# Altium PCB PCB1.PcbDoc (part 1 of 2)
Units mil, origin at the board's own origin, x right, y up, seen from the top; angles counter-clockwise.
Board outline 2180.03 x 4000.03 mil, 4 copper layers (Top Layer, GROUND, PWR, Bottom Layer), stack 23.756 mil thick; 106 components, 124 nets, 404 pads, 178 vias.
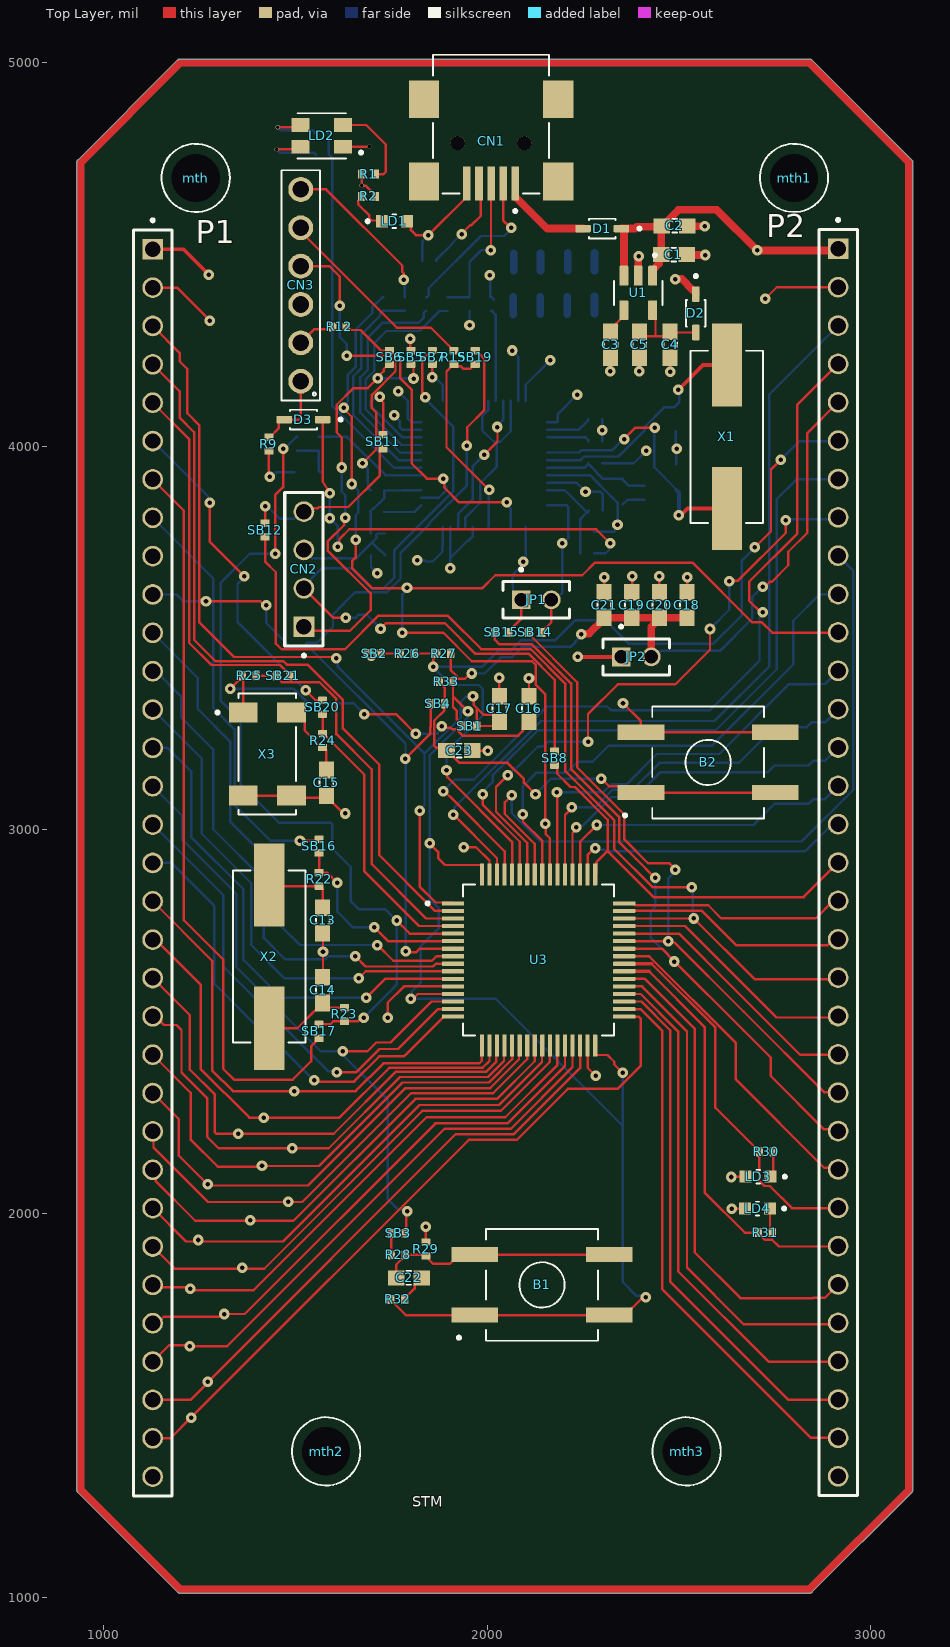
[diagram p0: Top Layer view]
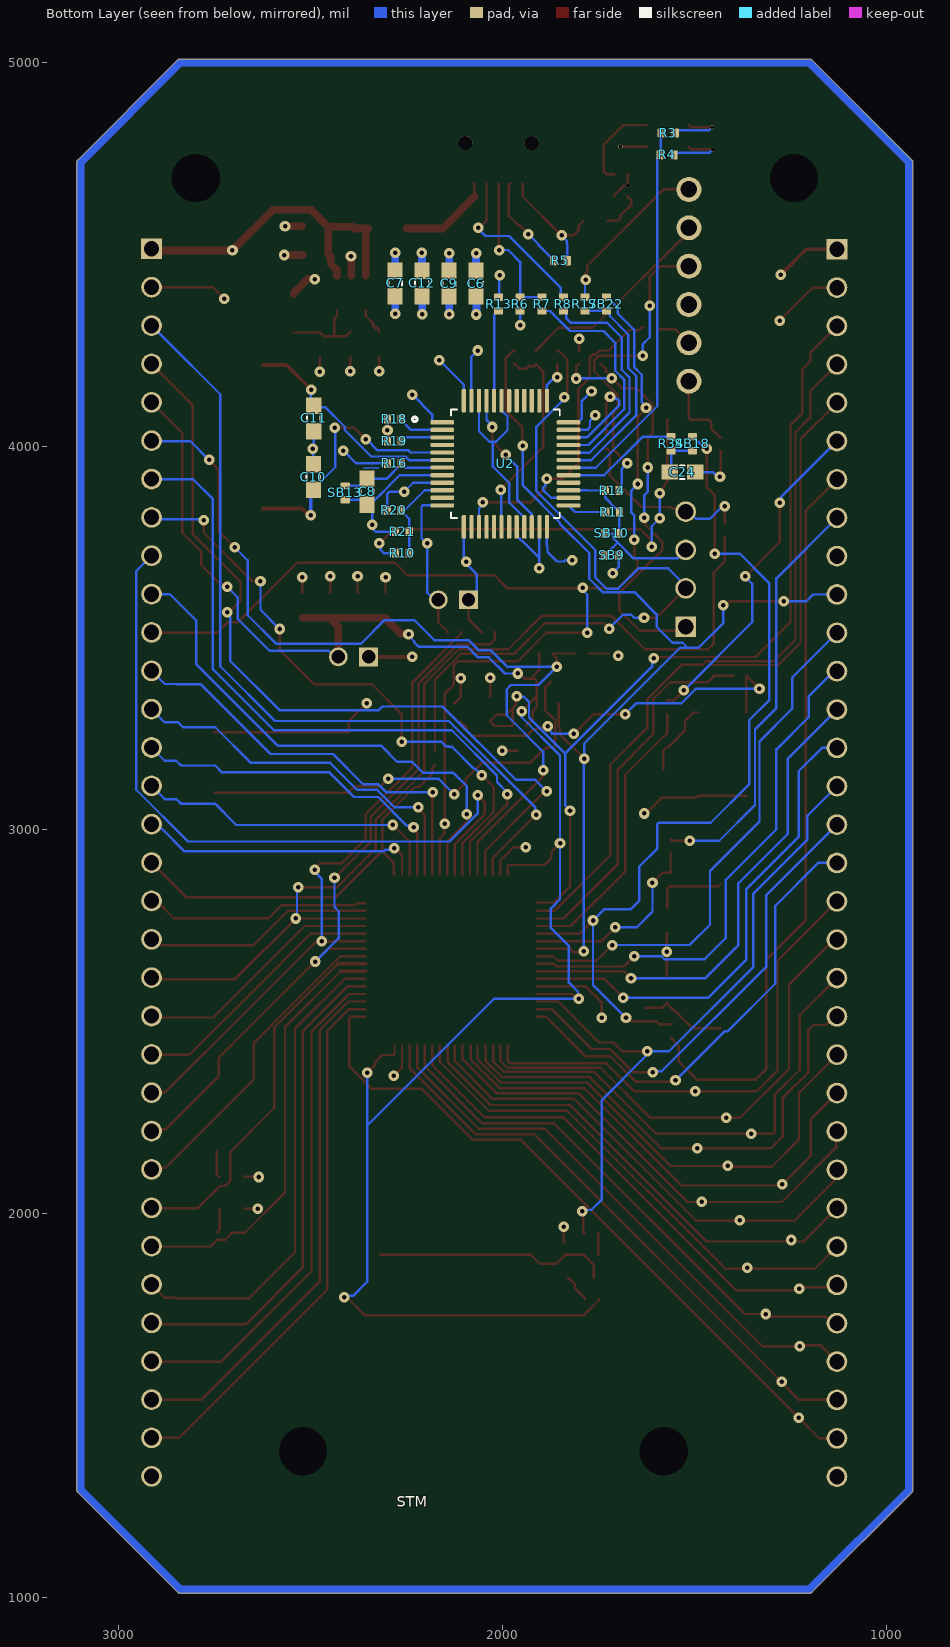
[diagram p1: Bottom Layer view, seen from below]
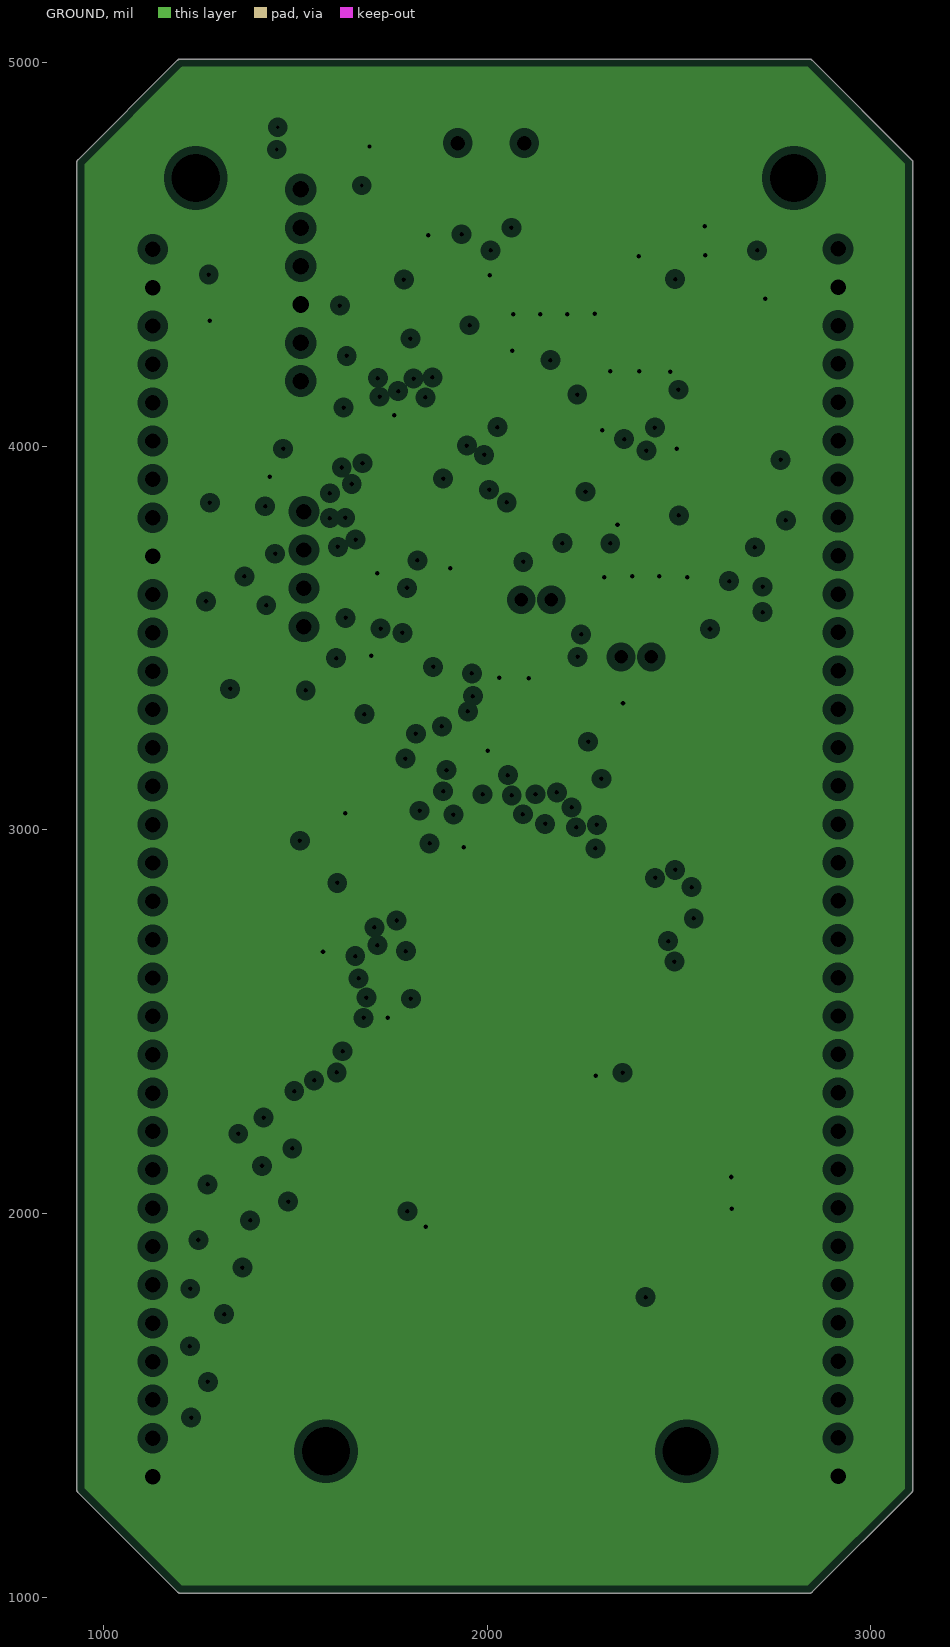
[diagram p2: GROUND, clearances drawn from the general rule]
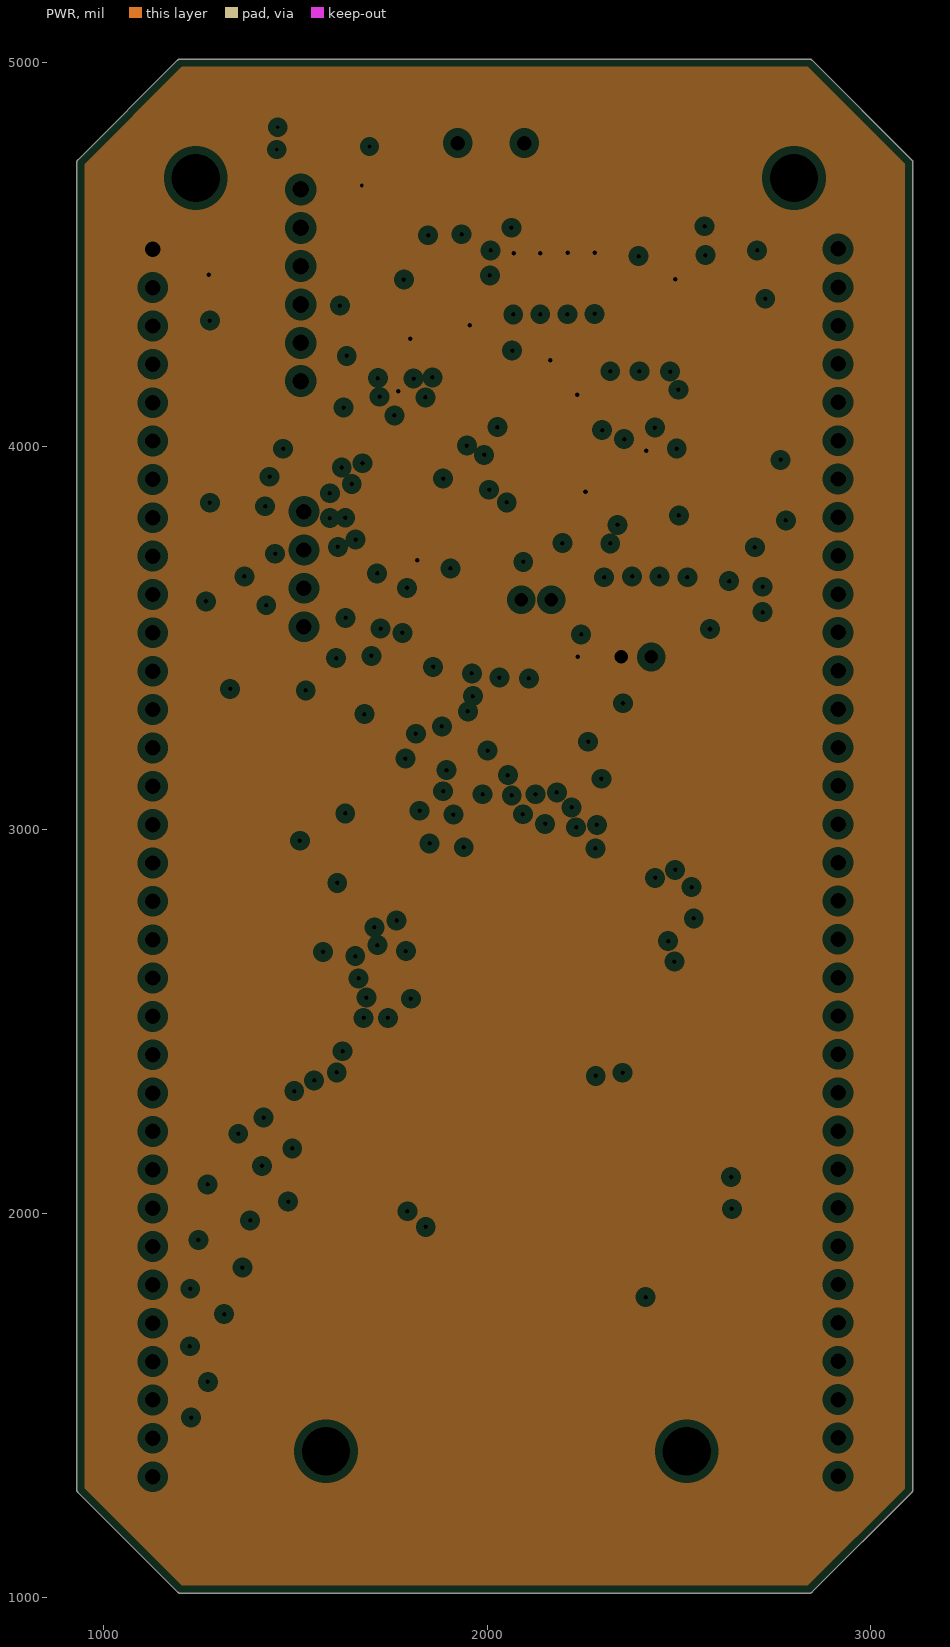
[diagram p3: PWR, clearances drawn from the general rule]

## Layer stack, top to bottom
Top Solder: solder mask 0.4, Solder Resist, Dk 3.5
Top Layer: signal copper 1.4
Dielectric 1: prepreg 2.8, PP-006, Dk 4.1
GROUND: plane copper 1.378, net GND
Dielectric 2: dielectric 12.6, FR-4, Dk 4.8
PWR: plane copper 1.378, net 3V
Dielectric 3: prepreg 2.8, PP-006, Dk 4.1
Bottom Layer: signal copper 1.4
Bottom Solder: solder mask 0.4, Solder Resist, Dk 3.5

## Board outline
1192.92,1012.92 932.92,1272.92 cw(c940,1280) 929.99,1280 929.99,4740 cw(c940,4740) 932.92,4747.08 1192.92,5007.08 cw(c1200,5000) 1200,5010.02 2840,5010.02 cw(c2840,5000) 2847.08,5007.08 3107.08,4747.08 cw(c3100,4740) 3110.01,4740 3110.01,1280 cw(c3100,1280) 3107.08,1272.92 2847.08,1012.92 cw(c2840,1020) 2840,1009.99 1200,1009.99 cw(c1200,1020)

## Design rules (kind name [scope] priority, off if disabled: settings)
Clearance [All] p1: gap=1 ignorepadtopadclearanceinfootprint=FALSE except(0: Arc-Hole Track-Hole SMDPad-Hole THPad-Hole Via-Hole Fill-Hole Poly-Hole Region-Hole Text-Hole)
MinimumSolderMaskSliver [All] p1: minsoldermaskwidth=0
PlaneClearance [All] p1: clearance=20
PlaneConnect [All] p1: planeconnectstyle=Relief reliefexpansion=20 reliefentries=4 reliefconductorwidth=10 reliefairgap=10
PolygonConnect [All] p1: connectstyle=Relief reliefconductorwidth=10 reliefentries=4 polygonreliefangle="90 Angle" airgapwidth=10
RoutingVias [All] p1: holewidth=28 width=50 viastyle="Through Hole" minholewidth=1 minwidth=1 maxholewidth=28 maxwidth=50
SilkToSolderMaskClearance [IsPad] p1: minsilkscreentomaskgap=0 clearancetoexposedcopper=TRUE
SolderMaskExpansion [All] p1: expansion=4 istentingtop=FALSE
Width [All] p1: maxlimit=30 minlimit=1 preferedwidth=1 minimp=50.000000 maximp=50.000000 favimp=50.000000
26 further rules are at their usual default settings.

## Classes and differential pairs
component class U_STM32Fx: B1 B2 C13 C14 C15 C16 C17 C18 C19 C20 C21 C22 C23 LD3 LD4 R22 R23 R24 R25 R26 R27 R28 R29 R30 R31 R32 R33 SB1 SB2 SB3 SB4 SB16 SB17 SB18 SB20 SB21 U3 X2 X3
component class U_ST_LINK: C1 C2 C3 C4 C5 C6 C7 C8 C9 C10 C11 C12 C24 CN1 CN2 CN3 D1 D2 D3 JP1 JP2 LD1 LD2 R1 R2 R3 R4 R5 R6 R7 R8 R9 R10 R11 R12 R13 R14 R15 R16 R17 R18 R19 R20 R21 R34 SB5 SB6 SB7 SB8 SB9 SB10 SB11 SB12 SB13 SB14 SB15 SB19 SB22 U1 U2 X1
component class MB1134: mth mth1 mth2 mth3 P1 P2

## Components (designator, comment, footprint, x,y, rotation, side; value= is the part's Value field where it differs from the comment)
B1 "SW-PUSH-CMS" SW_TL6120DF300QG 2143,1814 r0 top
B2 "SW-PUSH-CMS" SW_TL6120DF300QG 2576,3176 r0 top
C1 "1µF_X5R_0603" CAPC1608X90 2487,4500 r180 top value=1µF
C2 "20pF" CAPC1608X90 2488.54,4575 r180 top
C3 "10nF_X7R_0603" CAPC1608X90 2322,4265 r90 top value=10NF
C4 "1µF_X5R_0603" CAPC1608X90 2477,4265 r270 top value=1µF
C5 "20pF" CAPC1608X90 2397,4265 r90 top
C6 "20pF" CAPC1608X90 2069,4424.46 r90 bottom
C7 "20pF" CAPC1608X90 2280,4424.93 r90 bottom
C8 "20pF" CAPC1608X90 2353,3882 r90 bottom
C9 "20pF" CAPC1608X90 2139,4424.46 r90 bottom
C10 "20pF" CAPC1608X90 2493,3920 r270 bottom
C11 "20pF" CAPC1608X90 2492,4073 r90 bottom
C12 "20pF" CAPC1608X90 2210,4424.93 r270 bottom
C13 "20pF" CAPC1608X90 1571,2764 r90 top
C14 "20pF" CAPC1608X90 1571,2582.46 r270 top
C15 "20pF" CAPC1608X90 1581,3123 r90 top
C16 "20pF" CAPC1608X90 2109,3315.54 r270 top
C17 "20pF" CAPC1608X90 2032,3315.54 r90 top
C18 "20pF" CAPC1608X90 2521,3586.46 r270 top
C19 "20pF" CAPC1608X90 2377,3586.54 r90 top
C20 "20pF" CAPC1608X90 2449,3586.54 r90 top
C21 "20pF" CAPC1608X90 2305,3586.54 r90 top
C22 "20pF" CAPC1608X90 1796,1832 r0 top
C23 "20pF" CAPC1608X90 1927.46,3207 r180 top
C24 "20pF" CAPC1608X90 1530.93,3933 r180 bottom
CN1 "5075BMR-05-SM" AMPHENOL_10033526-N3212LF 2010.2,4790.83 r180 top
CN2 "Header 4" SAMTEC_TSW-104-23-F-S 1522.29,3530 r90 top
CN3 "Header 6" 61300611121 1514,4420 r90 top
D1 "BAT60JFILM" SOD2613X115N 2300,4568 r180 top
D2 "BAT60JFILM" SOD2613X115N 2544,4347 r270 top
D3 "BAT60JFILM" SOD2613X115N 1521,4070 r180 top
JP1 "" SAMTEC_MTMM-101-10-G-D-135 2128,3600 r270 top
JP2 "JP2" SAMTEC_MTMM-101-10-G-D-135 2388.63,3451.25 r270 top
LD1 "RED" LED_SML-D12Y1WT86 1758,4587 r0 top
LD2 "LD_BICOLOR_CMS" LED_XZM2CRKM2DGFBB45SCCB 1568.88,4809.46 r180 top
LD3 "RED" LED_SML-D12Y1WT86 2706.52,2096 r180 top
LD4 "RED" LED_SML-D12Y1WT86 2705,2013 r180 top
mth "Mouting hole non plated 3.2mm" mounting 1240,4700 r0 top
mth1 "Mouting hole non plated 3.2mm" mounting 2800,4700 r0 top
mth2 "Mouting hole non plated 3.2mm" mounting 1580,1380 r0 top
mth3 "Mouting hole non plated 3.2mm" mounting 2520,1380 r0 top
P1 "Header 33" SAMTEC_MTSW-133-22-S-S-400 1128,2914 r90 top
P2 "Header 33" SAMTEC_MTSW-133-22-S-S-400 2915,2915 r90 top
R1 "4K7" RESC1005X35N 1691.09,4710 r180 top
R2 "4K7" RESC1005X35N 1690.91,4652 r0 top
R3 "4K7" RESC1005X35N 1567.91,4817 r180 bottom
R4 "4K7" RESC1005X35N 1570.91,4760 r180 bottom
R5 "4K7" RESC1005X35N 1849,4484 r180 bottom
R6 "4K7" RESC1005X35N 1954,4370.91 r270 bottom
R7 "4K7" RESC1005X35N 1897,4370.91 r270 bottom
R8 "4K7" RESC1005X35N 1841,4371 r270 bottom
R9 "4K7" RESC1005X35N 1431,4006 r270 top
R10 "4K7" RESC1005X35N 2261.1,3721.6 r180 bottom
R11 "4K7" RESC1005X35N 1713,3829 r180 bottom
R12 "4K7" RESC1005X35N 1615,4311.36 r0 top
R13 "4K7" RESC1005X35N 2010,4371.09 r270 bottom
R14 "4K7" RESC1005X35N 1714,3885 r0 bottom
R15 "4K7" RESC1005X35N 1913,4232 r270 top
R16 "4K7" RESC1005X35N 2282,3956 r0 bottom
R17 "4K7" RESC1005X35N 1785,4371.09 r270 bottom
R18 "4K7" RESC1005X35N 2282,4071 r180 bottom
R19 "4K7" RESC1005X35N 2281.91,4014 r180 bottom
R20 "4K7" RESC1005X35N 2283,3833 r180 bottom
R21 "4K7" RESC1005X35N 2261.02,3777.6 r180 bottom
R22 "4K7" RESC1005X35N 1562,2871 r270 top
R23 "4K7" RESC1005X35N 1628,2519.09 r270 top
R24 "4K7" RESC1005X35N 1571,3232.91 r90 top
R25 "4K7" RESC1005X35N 1379.91,3402 r0 top
R26 "4K7" RESC1005X35N 1792,3460 r0 top
R27 "4K7" RESC1005X35N 1887,3460 r180 top
R28 "4K7" RESC1005X35N 1768,1892 r0 top
R29 "4K7" RESC1005X35N 1840,1907.09 r270 top
R30 "4K7" RESC1005X35N 2727.52,2161 r0 top
R31 "4K7" RESC1005X35N 2725,1950 r0 top
R32 "4K7" RESC1005X35N 1767,1776 r180 top
R33 "4K7" RESC1005X35N 1893,3387 r0 top
R34 "4K7" RESC1005X35N 1560.48,4006.88 r270 bottom
SB1 "Circuit Breaker" RESC1005X35N 1955,3271 r180 top
SB2 "Circuit Breaker" RESC1005X35N 1705,3460 r180 top
SB3 "Circuit Breaker" RESC1005X35N 1768,1948 r180 top
SB4 "Circuit Breaker" RESC1005X35N 1871,3329 r0 top
SB5 "Circuit Breaker" RESC1005X35N 1801,4232 r90 top
SB6 "Circuit Breaker" RESC1005X35N 1745,4232.09 r270 top
SB7 "Circuit Breaker" RESC1005X35N 1857,4232.09 r270 top
SB8 "Circuit Breaker" RESC1005X35N 2176,3187.09 r90 top
SB9 "Circuit Breaker" RESC1005X35N 1715,3716 r180 bottom
SB10 "Circuit Breaker" RESC1005X35N 1715,3773 r0 bottom
SB11 "Circuit Breaker" RESC1005X35N 1729,4012 r90 top
SB12 "Circuit Breaker" RESC1005X35N 1421,3782 r90 top
SB13 "Circuit Breaker" RESC1005X35N 2410,3879 r90 bottom
SB14 "Circuit Breaker" RESC1005X35N 2125,3515 r0 top
SB15 "Circuit Breaker" RESC1005X35N 2038,3515 r0 top
SB16 "Circuit Breaker" RESC1005X35N 1562,2958.09 r90 top
SB17 "Circuit Breaker" RESC1005X35N 1562,2475.09 r90 top
SB18 "Circuit Breaker" RESC1005X35N 1504.48,4006.88 r90 bottom
SB19 "Circuit Breaker" RESC1005X35N 1969,4232 r90 top
SB20 "Circuit Breaker" RESC1005X35N 1571,3319.91 r270 top
SB21 "Circuit Breaker" RESC1005X35N 1467.91,3402 r180 top
SB22 "Circuit Breaker" RESC1005X35N 1729,4371.09 r90 bottom
U1 "LD3985M33R" SOT95P280X145-5N 2394,4400 r270 top
U2 "STM32F103C8T6" QFP50P900X900X160-48N 1992.47,3954.57 r180 bottom
U3 "STM32F030R8T6" QFP50P1200X1200X160-64N 2134,2661 r0 top
X1 "8MHz" XTAL_ECS-080-20-5PX-TR 2625,4025 r270 top
X2 "8MHz" XTAL_ECS-080-20-5PX-TR 1432,2670 r90 top
X3 "MC306-G-06Q-32.768 (JFVNY)" *XTAL_MC-306_32.7680K-A:_ROHS 1427,3198 r0 top

## Footprints (in the part's own frame and the unit in brackets; to place one, negate y for a bottom-side part, rotate by r counter-clockwise, add the part's x,y. Pads: shape width x height; smd on the part's side, far side on the other; paste and mask are expansions set on the pad)
61300611121 [mm]
  round 1.65 hole 1.1: 1(-6.35,0) 2(-3.81,0) 3(-1.27,0) 4(1.27,0) 5(3.81,0) 6(6.35,0)
  silkscreen extent -7.62,-1.27 7.62,1.27, body extent -7.62,-1.27 7.62,1.27, height 8.55
*XTAL_MC-306_32.7680K-A:_ROHS [mm]
  rect 1.9x1.3 smd: 1(-1.6,2.75) 2(-1.6,-2.75) 3(1.6,-2.75) 4(1.6,2.75)
  silkscreen extent -3.4,-4 1.9,4
AMPHENOL_10033526-N3212LF [mm]
  rect 0.5x2.25 smd: 1(-1.6,2.675) 2(-0.8,2.675) 3(0,2.675) 4(0.8,2.675) 5(1.6,2.675)
  rect 2x2.5 smd: SH1(-4.45,2.55) SH2(4.45,2.55) SH3(-4.45,-2.9) SH4(4.45,-2.9)
  round 0.95 hole 0.95 unplated: ""(-2.2,0) ""(2.2,0)
  silkscreen extent -3.85,-5.85 3.85,4.6, body extent -4.95,-5.98 4.95,3.34, height 3.96
CAPC1608X90 [mm]
  rect 1.1x1 smd: 1(-0.85,0) 2(0.85,0)
  silkscreen extent -0.15,-0.45 0.15,0.45, body extent -0.8,-0.41 0.8,0.41, height 0.9
LED_SML-D12Y1WT86 [mm]
  rect 0.8x0.8 smd: 1(-0.825,0) 2(0.825,0)
  silkscreen extent -1.86,-0.45 0.11,0.45
LED_XZM2CRKM2DGFBB45SCCB [mm]
  rect 1.2x0.9 smd: 1(-1.4,0.725) 2(1.4,0.725) 3(1.4,-0.725) 4(-1.4,-0.725)
  silkscreen extent -2.7,-1.5 1.6,1.5
mounting [mm]
  round 1 hole 3.2: ""(0,0)
  silkscreen extent -2.26,-2.26 2.26,2.26
QFP50P900X900X160-48N [mm]
  rrect50% 1.56x0.28 smd: 1(-4.18,2.75) 2(-4.18,2.25) 3(-4.18,1.75) 4(-4.18,1.25) 5(-4.18,0.75) 6(-4.18,0.25) 7(-4.18,-0.25) 8(-4.18,-0.75) 9(-4.18,-1.25) 10(-4.18,-1.75) 11(-4.18,-2.25) 12(-4.18,-2.75) 25(4.18,-2.75) 26(4.18,-2.25) 27(4.18,-1.75) 28(4.18,-1.25) 29(4.18,-0.75) 30(4.18,-0.25) 31(4.18,0.25) 32(4.18,0.75) 33(4.18,1.25) 34(4.18,1.75) 35(4.18,2.25) 36(4.18,2.75)
  rrect50% 0.28x1.56 smd: 13(-2.75,-4.18) 14(-2.25,-4.18) 15(-1.75,-4.18) 16(-1.25,-4.18) 17(-0.75,-4.18) 18(-0.25,-4.18) 19(0.25,-4.18) 20(0.75,-4.18) 21(1.25,-4.18) 22(1.75,-4.18) 23(2.25,-4.18) 24(2.75,-4.18) 37(2.75,4.18) 38(2.25,4.18) 39(1.75,4.18) 40(1.25,4.18) 41(0.75,4.18) 42(0.25,4.18) 43(-0.25,4.18) 44(-0.75,4.18) 45(-1.25,4.18) 46(-1.75,4.18) 47(-2.25,4.18) 48(-2.75,4.18)
  silkscreen extent -6.15,-3.6 3.6,3.6, body extent -4.5,-4.5 4.5,4.5, height 1.46
QFP50P1200X1200X160-64N [mm]
  rrect25% 1.47x0.28 smd: 1(-5.67,3.75) 2(-5.67,3.25) 3(-5.67,2.75) 4(-5.67,2.25) 5(-5.67,1.75) 6(-5.67,1.25) 7(-5.67,0.75) 8(-5.67,0.25) 9(-5.67,-0.25) 10(-5.67,-0.75) 11(-5.67,-1.25) 12(-5.67,-1.75) 13(-5.67,-2.25) 14(-5.67,-2.75) 15(-5.67,-3.25) 16(-5.67,-3.75) 33(5.67,-3.75) 34(5.67,-3.25) 35(5.67,-2.75) 36(5.67,-2.25) 37(5.67,-1.75) 38(5.67,-1.25) 39(5.67,-0.75) 40(5.67,-0.25) 41(5.67,0.25) 42(5.67,0.75) 43(5.67,1.25) 44(5.67,1.75) 45(5.67,2.25) 46(5.67,2.75) 47(5.67,3.25) 48(5.67,3.75)
  rrect25% 0.28x1.47 smd: 17(-3.75,-5.67) 18(-3.25,-5.67) 19(-2.75,-5.67) 20(-2.25,-5.67) 21(-1.75,-5.67) 22(-1.25,-5.67) 23(-0.75,-5.67) 24(-0.25,-5.67) 25(0.25,-5.67) 26(0.75,-5.67) 27(1.25,-5.67) 28(1.75,-5.67) 29(2.25,-5.67) 30(2.75,-5.67) 31(3.25,-5.67) 32(3.75,-5.67) 49(3.75,5.67) 50(3.25,5.67) 51(2.75,5.67) 52(2.25,5.67) 53(1.75,5.67) 54(1.25,5.67) 55(0.75,5.67) 56(0.25,5.67) 57(-0.25,5.67) 58(-0.75,5.67) 59(-1.25,5.67) 60(-1.75,5.67) 61(-2.25,5.67) 62(-2.75,5.67) 63(-3.25,5.67) 64(-3.75,5.67)
  silkscreen extent -7.44,-5 5,5, body extent -6,-6 6,6, height 1.46
RESC1005X35N [mm]
  rrect20% 0.49x0.6 smd: 1(-0.455,0) 2(0.455,0)
SAMTEC_MTMM-101-10-G-D-135 [mm]
  rect 1.24x1.24 hole 0.89: 1(0,-1)
  round 1.24 hole 0.89: 2(0,1)
  silkscreen extent -2.1,-2.2 1.2,2.2
SAMTEC_MTSW-133-22-S-S-400 [mm]
  rect 1.37x1.37 / inner round 1.37 / far side rect 1.37x1.37 hole 1.02: 1(40.64,0)
  round 1.37 hole 1.02: 2(38.1,0) 3(35.56,0) 4(33.02,0) 5(30.48,0) 6(27.94,0) 7(25.4,0) 8(22.86,0) 9(20.32,0) 10(17.78,0) 11(15.24,0) 12(12.7,0) 13(10.16,0) 14(7.62,0) 15(5.08,0) 16(2.54,0) 17(0,0) 18(-2.54,0) 19(-5.08,0) 20(-7.62,0) 21(-10.16,0) 22(-12.7,0) 23(-15.24,0) 24(-17.78,0) 25(-20.32,0) 26(-22.86,0) 27(-25.4,0) 28(-27.94,0) 29(-30.48,0) 30(-33.02,0) 31(-35.56,0) 32(-38.1,0) 33(-40.64,0)
  silkscreen extent -41.91,-1.27 42.66,1.27, body extent -41.91,-1.27 41.91,1.27, height 12.71
SAMTEC_TSW-104-23-F-S [mm]
  rect 1.37x1.37 / inner round 1.37 / far side rect 1.37x1.37 hole 1.02: 1(0,0)
  round 1.37 hole 1.02: 2(2.54,0) 3(5.08,0) 4(7.62,0)
  silkscreen extent -2.02,-1.27 8.89,1.27, body extent -1.4,-1.4 8.89,1.14, height 8.39
SOD2613X115N [mm]
  rrect25% 1.03x0.49 smd: 1(1.27,0) 2(-1.27,0)
  silkscreen extent -2.56,-0.65 0.89,0.65, body extent -1.34,-0.65 1.34,0.65, height 1.15
SOT95P280X145-5N [mm]
  rrect25% 1.32x0.59 smd: 1(-1.145,0.95) 2(-1.145,0) 3(-1.145,-0.95) 4(1.145,-0.95) 5(1.145,0.95)
  silkscreen extent -2.6,-1.6 0.8,1.6, body extent -1.4,-1.48 1.4,1.47, height 1.11
SW_TL6120DF300QG [mm]
  rect 3.1x1 smd: 1(-4.45,-2) 2(4.45,-2) 3(-4.45,2) 4(4.45,2)
  silkscreen extent -5.6,-3.7 3.7,3.7, body extent -5,-3.7 5,3.7, height 10.01
XTAL_ECS-080-20-5PX-TR [mm]
  rect 5.5x2 smd: 1(-4.75,0) 2(4.75,0)
  silkscreen extent -5.7,-2.4 5.7,2.4, body extent -6.6,-2.39 6.6,2.41, height 4.3

## Part data
B1 B2: "Non-Open Push-Button 0.1A 24V", Manuf_Part_1=TD-0341, cap_dec=---, Manuf_1=http://www.xiejia.net/, Ref St=********
C1 C4: library part "CAP SMD 0603  X5R 1µF 25V 10%", "0603  X5R 1µF", Rated voltage=25V, Temperature Max=+125°C, Temperature Min=-55°C, Tolerance=10%, Order code Farnell=1288202RL, Technology=X5R
C2 C5 C6 C7 C8 C9 C10 C11 C12 C13 C14 C15 C16 C17 C18 C19 C20 C21 C22 C23 C24: library part Cap, "Capacitor", Published=8-Jun-2000, Publisher="Altium Limited", Revision="July-2002: Re-released for DXP Platform."
C3: library part "CAP SMD 0603  X7R 10000PF 50V 10%", "0603  X7R 10NF", Rated voltage=50V, Temperature Max=+125°C, Temperature Min=-55°C, Tolerance=10%, Order code Farnell=7569548RL, Order code RS=2040779, Technology=X7R
CN1: library part "USB-MINI-typeB connector"
CN2: "Header, 4-Pin", Publisher="Altium Limited", Revision="17-Jul-2002: Re-released for DXP Platform."
CN3: "Header, 6-Pin", LatestRevisionDate=17-Jul-2002, LatestRevisionNote="Re-released for DXP Platform.", Publisher="Altium Limited"
D1 D2 D3: Manuf_1=STM, Code - JEDEC=DO-214-AB, Distrib=ST, Manuf_Part_1=BAT60JFILM, Order=BAT60JFILM, Provided=ST, Published=8-Jun-2000, Publisher="Altium Limited", Revision="July-2002: Re-released for DXP Platform."
JP1: library part JP2
LD1 LD3 LD4: library part PHOTO
LD2: "Bicolor Led", Manuf_1="Avago Technologies", Manuf_Part_1=HSMF-A201-A00J1, cap_dec=----, Distrib=RADIOSPARES, Ref St=xxxxxx, support=----
mth mth1 mth2 mth3: library part mth
P1 P2: "Header, 33-Pin", LatestRevisionDate=17-Jul-2002, LatestRevisionNote="Re-released for DXP Platform.", Publisher="Altium Limited"
R1 R2 R3 R4 R5 R6 R7 R8 R9 R10 R11 R12 R13 R14 R15 R16 R17 R18 R19 R20 R21 R22 R23 R24 R25 R26 R27 R28 R29 R30 R31 R32 R33 R34: library part res1, "Resistor", Published=8-Jun-2000, Publisher="Altium Limited", Revision="July-2002: Re-released for DXP Platform."
U1: "Ultra low drop-low noise BiCMOS voltage, regulators low ESR capacitors compatible", Manuf_1=STM, Distrib=ST, Manuf_Part_1=LD3985M33R, Order=LD3985M33R, Provided=ST, Ref St=9176161
U2: "Medium-density performance line ARM-based 32-bit MCU with 64KB Flash, USB, CAN, 7 timers, 2 ADCs", Manuf_1=STM, Distrib=ST, Manuf_Part_1=STM32F103C8T6, Order=STM32F103C8T6, Provided=ST, Ref St=9175981
U3: "Advanced ARM based 32-bit Cortex M0 MCU with 64 Kbytes Flash and 8 Kbytes of SRAM", Manuf_1=STM, Manuf_Part_1=STM32F051R8T6, Distrib=ST, Order=STM32F051R8T6, Provided=ST
X1 X2: library part XTAL, "Crystal Oscillator", LatestRevisionDate=17-Jul-2002, LatestRevisionNote="Re-released for DXP Platform.", PackageReference=R38, Published=8-Jun-2000, Publisher="Altium Limited"
X3: library part MC306, Fitted=NO
SB1 SB2 SB3 SB4 SB5 SB6 SB7 SB8 SB9 SB10 SB11 SB12 SB13 SB14 SB15 SB16 SB17 SB18 SB19 SB20 SB21 SB22: Published=24-Mar-1999, Publisher="Altium Limited", Revision="July-2002: Re-released for DXP Platform.", Solder=NO

## Via types
v1: diameter 27.56, hole 11.81, Top Layer to Bottom Layer, 166 vias
v2: diameter 11, hole 10, Top Layer to Bottom Layer, tented top, 4 vias
v3: diameter 27.56, hole 11.81, PWR to Bottom Layer, 4 vias
v4: diameter 27.56, hole 11.81, GROUND to Bottom Layer, 4 vias

## Nets (pads, with @x,y where several pads share a name; then routed paths per layer and width w, separated by ;. In a path a pad name is that pad's centre, name@x,y a point inside that pad or via, vN(x,y) a via of type N, cw(c..) or ccw(c..) an arc to the next point about the centre after c; other vN are vias at no path point)
3V: C6.2 C7.2 C9.2 C12.1 D2.2 JP2.1 P1.1 R1.2 R2.2 R6.2 R16.2 R20.1 SB5.2 U2.1 U2.9 U2.24 U2.36 U2.48 | length 1525.2
  Top Layer w6.3: v2(1673,4680) 1673.19,4679.81 1683.18,4679.81 1708.83,4654.17 R2.2@1708.83,4652 ; v2@1673.17,4680.17 1673.09,4680.26 1673.09,4709.91 R1.2@1673.17,4710 ; v1(1800,4281) 1800,4250.91 SB5.2@1801,4249.91
  Top Layer w10: P1.1@1128,4514 1208,4514 v1(1274,4448) ; v1@2235,3452 v1(2235.75,3451.25) JP2.1@2349.26,3451.25
  Top Layer w19.68: v1@2493,4437 2507.14,4437 2536.51,4407.63 2538.29,4407.63 D2.2@2541.15,4404.78 ; D2.2@2544,4397 D2.2@2544,4400.14
  Bottom Layer w6.3: v1(1768,4144) 1768,4143.86 1793,4118.86 1793,4072.54 1802.71,4062.83 U2.36@1827.91,4062.83 ; v1(1818,3703) 1837.14,3703 1840.14,3700 1858,3700 1882.73,3724.73 1882.73,3739.29 1884.2,3740.76 U2.24@1884.2,3790 ; v1(1954,4316) R6.2@1954,4353 ; U2.48@2100.74,4119.13 2100.74,4160.74 v1(2165,4225) ; U2.9@2157.04,3905.35 2232.65,3905.35 2256,3882 2294.73,3882 2300.91,3875.82 R20.1@2300.91,3833 ; U2.1@2157.04,4062.83 2181.19,4062.83 2183.55,4065.2 2183.55,4083.55 v1(2235,4135) ; R16.2@2299.91,3956 2382,3956 v1(2415,3989)
  Bottom Layer w20: C6.2@2069,4457.93 v3(2069,4503.93) ; C9.2@2139,4457.93 v3(2139,4503.93) ; C12.1@2210,4458.39 v3(2210,4504.39) ; C7.2@2280,4458.39 v3(2280,4504.39)
  other v1: 2256.43,3881.64 2490,4436
5V: C1.2 C2.2 D1.2 P2.1 U1.1 U1.3 | length 893.1
  Top Layer w20: D1.2@2350,4568 D1.2@2351.95,4568 ; U1.3@2356.6,4445.08 2356.6,4563.35 D1.2@2351.95,4568 ; U1.1@2431.4,4445.08 2431.4,4459.45 2447.88,4475.93 2447.88,4494.35 2454.3,4500.77 C2.2@2454.3,4573 ; P2.1@2915,4515 2911,4511 v1(2704,4511) 2598,4617 2499.04,4617 2455.04,4573 C2.2@2454.3,4573 ; D1.2@2351.95,4568 2385.28,4568 2390.28,4573 2453.07,4573 C2.2@2454.3,4573
AIN_1: R10.2 R20.2 R21.2 U2.10 | length 257.1
  Bottom Layer w6.3: U2.10@2157.04,3885.67 2202.75,3885.67 R20.2@2260.25,3828.17 ; R21.2@2243.1,3777.6 2243.1,3811.02 R20.2@2260.25,3828.17 ; R10.2@2243.19,3721.6 R21.2@2243.19,3777.6 ; R20.2@2260.25,3828.17 R20.2@2265.09,3833 2262.39,3830.31 2262.39,3827.08 2261.33,3827.08 R20.2@2260.25,3828.17
BOOT0: P2.6 R26.2 R27.2 U3.60 | length 2375.2
  Top Layer w6.3: R26.2@1809.91,3460 R27.2@1869.09,3460 1869.09,3457.83 1859,3447.75 v1(1859,3425) ; v1(1894,3156) 1896.13,3153.87 1896.13,3137.87 2065.1,2968.9 U3.60@2065.1,2884.23 ; v1(2698,3737) 2740,3779 2740,3940 v1(2765,3965)
  Bottom Layer w6.3: v1(1894,3156) 1894,3204 1989,3299 1989,3367 1978,3378 1906,3378 v1(1859,3425) 1859.93,3425.93 1987.93,3425.93 2031,3469 2063,3469 2089,3495 2178,3495 2230,3547 2307.75,3547 2369.75,3485 2589,3485 2664,3560 2664,3703 v1(2698,3737) ; v1(2765,3965) 2814,4014 2914,4014 P2.6@2915,4015
GND: B2.3 B2.4 C1.1 C2.1 C3.1 C4.2 C5.1 C6.1 C7.1 C8.1 C9.1 C10.1 C11.1 C12.2 C13.1 C14.1 C15.1 C16.1 C17.2 C18.1 C19.2 C20.2 C21.2 C23.1 C24.2 CN1.5 CN3.3 LD1.2 LD2.1 LD3.2 LD4.2 P1.2 P1.9 P1.33 P2.2 P2.33 R5.2 R9.2 R13.1 R18.1 R19.1 R21.1 R29.1 SB2.2 SB9.2 SB13.1 U1.2 U2.8 U2.20 U2.23 U2.35 U2.47 U3.12 U3.31 U3.63 X3.2 X3.3 | length 4196.7
  Top Layer w6.3: P1.33@1128,1314 P1.33@1140.89,1314 ; P1.2@1128,4414 1191,4414 v1(1277,4328) ; X3.2@1364.01,3089.73 X3.3@1489.99,3089.73 1496.19,3083.54 1585.03,3083.54 1625.57,3043 v1(1630,3043) ; R9.2@1431,3988.09 1431,3923 v1(1433,3921) ; C14.1@1571,2615.93 1572,2616.93 1572,2729.54 C13.1@1571,2730.54 ; LD2.1@1624,4780.91 1624.09,4781 1691.73,4781 1692.73,4782 v2(1693,4782) ; v1(1741,2510) 1741,2550 1783.1,2592.1 U3.12@1910.77,2592.1 ; LD1.2@1790.48,4587 1801.23,4576.25 1801.23,4563.82 1814.04,4551 1847.14,4551 1947.2,4651.06 CN1.5@1947.2,4685.51 ; R29.1@1840,1925 v1(1840,1965) ; v1(1939,2955) 1971,2955 2006.05,2919.95 U3.63@2006.05,2884.23 ; C23.1@1960.93,3207 v1(2001,3207) ; C17.2@2032,3349 v1(2032,3397.07) ; v1(2109,3395.07) 2109,3347.03 C16.1@2125.54,3330.5 ; U3.31@2261.95,2437.77 2261.95,2380.05 v1(2283,2359) ; C21.2@2305,3620 v1(2305,3659) ; v1(2321,4196) 2321,4230.54 C3.1@2322,4231.54 ; v1(2354.18,3330.5) 2400.8,3283.87 B2.3@2400.8,3254.74 B2.4@2751.2,3254.74 ; C19.2@2377,3620 2378,3621 v1(2378,3661) ; v1@2397,4200 C5.1@2397,4231.54 ; C20.2@2449,3620 v1(2449,3661) ; v1@2477,4200 C4.2@2477,4231.54 ; C18.1@2521,3619.93 2522,3620.93 v1(2522,3659) ; v1@2636.52,2095 2637.52,2096 LD3.2@2674.04,2096 ; v1(2638,2012) 2671.52,2012 LD4.2@2672.52,2013 ; v1(2725,4385) 2755,4415 P2.2@2915,4415
  Top Layer w20: U1.2@2394,4445.08 v1@2394,4494 ; C1.1@2520.46,4500 2521.46,4499 v1(2569,4499) ; C2.1@2522,4575 2523,4574 v1(2567,4574)
  Bottom Layer w6.3: v1(1433,3921) 1438.75,3921 1450.75,3933 C24.2@1497.46,3933 ; SB9.2@1697.09,3716 1697.09,3685.94 1713,3670.02 v1(1713,3669) ; v1@1759,4079 1759,4078.73 1771.78,4065.95 1771.78,4050.22 1778.85,4043.15 U2.35@1827.91,4043.15 ; R5.2@1831.09,4484 1831.09,4528.69 1832.17,4529.77 1832.17,4536.17 v1@1847,4551 ; U2.23@1903.89,3790 1903.89,3708.99 ; v1@1904,3682 v1(1903.94,3682.06) 1903.89,3708.99 ; 1954.77,3758.42 1949.64,3753.29 1948.19,3753.29 1903.89,3708.99 ; 1954.77,3758.43 1960.63,3764.29 1962.43,3764.29 1962.94,3764.8 U2.20@1962.94,3790 ; v1(2007,4446) 2008.5,4444.5 2008.5,4390.5 R13.1@2010,4389 2012.17,4389 2016.81,4384.35 R13.1@2016.81,4382.19 ; v1(2065,4250) 2081.06,4233.94 U2.47@2081.06,4119.13 ; C6.1@2068,4390 C6.1@2069,4391 ; C9.1@2138.5,4390.5 C9.1@2139,4391 ; U2.8@2157.06,3925.02 2267.98,3925.02 2295.19,3897.81 2295.19,3897.52 2322.4,3870.31 2322.69,3870.31 2340,3853 2340,3805 2339.81,3804.81 2339.81,3786.27 2331.14,3777.6 R21.1@2278.93,3777.6 ; C12.2@2209,4390.46 C12.2@2210,4391.46 ; C7.1@2279,4390.46 C7.1@2280,4391.46 ; R19.1@2299.83,4014 2299.87,4014.04 v1(2299.87,4042.5) R18.1@2299.91,4071 R18.1@2299.91,4071 ; C8.1@2353,3848.54 2365.55,3861.09 SB13.1@2410,3861.09 ; C11.1@2492,4039.54 2492,3996.27 2493,3995.27 C10.1@2493,3953.46
  Bottom Layer w20: v4(2068,4344) C6.1@2068,4390 ; v4(2138.5,4344.5) C9.1@2138.5,4390.5 ; v4(2209,4344.46) C12.2@2209,4390.46 ; v4(2280,4345.46) C7.1@2280,4391.46
  other v1: 2636.06,2095.25 1572,2682 1698,3454 2339.81,3795.54 2494.35,3994.39 1758,4081 2477,4195 2397,4196 2395,4496 1845.86,4550.53
LED_STLINK: R3.1 R4.1 U2.30 | length 1014.8
  Bottom Layer w6.3: R3.1@1585.83,4817 1587.33,4815.5 1587.33,4761.5 R4.1@1588.83,4760 1594.8,4754.03 1596.64,4752.18 1596.63,4492.6 1596.63,4490.88 1596.63,4104.63 1757.06,3944.21 1827.39,3944.21 U2.30@1827.91,3944.72
MCO: C24.1 R34.2 SB18.1 | length 113.6
  Bottom Layer w6.3: SB18.1@1504.48,3988.97 R34.2@1560.48,3988.97 1560.48,3936.92 C24.1@1564.39,3933
NetB1_3: B1.3 B1.4 C22.1 R28.2 R29.2 | length 622.1
  Top Layer w6.3: C22.1@1762.54,1832 1762.54,1866.46 1785.91,1889.83 R28.2@1785.91,1892 1786.41,1892.5 1836.67,1892.5 R29.2@1840,1889.17 ; R29.2@1839.37,1888.55 1858.92,1869 1902.72,1869 1926.46,1892.74 B1.3@1967.8,1892.74 B1.4@2318.2,1892.74
NetB2_1: B2.1 B2.2 C23.2 R33.1 SB4.2 | length 1163.5
  Top Layer w6.3: R33.1@1875.09,3387 1875.09,3384.83 1888.91,3371.01 SB4.2@1888.91,3329 1888.43,3328.52 1888.43,3311.43 1862,3285 1862,3219 1866.59,3214.41 1886.59,3214.41 C23.2@1894,3207 1895.97,3207 1927.97,3175 2053.36,3175 2095.68,3132.68 2095.68,3123.32 v1(2126,3093) ; v1@2298,3134 2318.2,3113.8 2384.27,3113.8 B2.1@2400.8,3097.26 B2.2@2751.2,3097.26
  Bottom Layer w6.3: v1(2126,3093) 2166.63,3133.63 v1(2297.75,3133.63)
NetC3_2: C3.2 U1.4 | length 85.8
  Top Layer w6.3: C3.2@2322,4298.46 2322,4305.95 2326.58,4310.54 2332.1,4310.54 2336.69,4315.12 2336.69,4320.64 2356.6,4340.55 U1.4@2356.6,4354.92 ; C3.2@2330.33,4306.79 C3.2@2338.65,4315.12
NetC4_1: C4.1 C5.2 D2.1 U1.5 | length 227.3
  Top Layer w6.3: C5.2@2397,4298.46 2408,4287.46 2439,4287.46 ; U1.5@2431.4,4354.92 2431.4,4340.55 2439,4332.95 2439,4287.46 ; D2.1@2544,4297 2478.46,4297 C4.1@2477,4298.46 2466,4287.46 2439,4287.46
NetC13_2: C13.2 R22.2 X2.2 | length 192.2
  Top Layer w6.3: X2.2@1432,2857.01 1435.92,2853.09 R22.2@1562,2853.09 1564.17,2853.09 1571,2846.25 C13.2@1571,2797.46
NetC14_2: C14.2 R23.1 X2.1 | length 229.5
  Top Layer w6.3: X2.1@1432,2482.99 1504.99,2482.99 1552.5,2530.5 1554.46,2530.5 1571,2547.03 C14.2@1571,2549 1583,2537 R23.1@1628,2537
NetC15_2: C15.2 R24.1 X3.4 | length 197
  Top Layer w6.3: X3.4@1489.99,3306.27 1501.8,3306.27 1524.24,3283.83 1524.24,3259.59 1568.83,3215 1573.17,3215 1581,3207.17 C15.2@1581,3156.46
NetC16_2: C16.2 R25.1 X3.1 | length 1019.3
  Top Layer w6.3: v1@1330,3366 v1(1330,3367.83) 1362,3399.83 R25.1@1362,3402 1364,3400 X3.1@1364.01,3306.27 ; v1(1680,3302) 1762,3302 v1@1816.34,3247.66 ; v1(1882.03,3269.97) 1885.85,3266.15 1905.26,3266.15 1908.41,3263 1918.89,3263 1935.89,3246 2081.17,3246 2092.46,3257.3 2092.46,3265.54 C16.2@2109,3282.07
  Bottom Layer w6.3: v1(1330,3367.83) 1496.17,3367.83 1534,3330 1652,3330 v1(1680,3302) ; v1(1814,3251) 1871.25,3251 1871.25,3253.43 1882.03,3264.22 v1(1882.03,3269.97)
NetC22_2: C22.2 R32.1 | length 75.6
  Top Layer w6.3: R32.1@1784.91,1776 1784.91,1778.17 1810.96,1804.21 1810.96,1815.46 1827.5,1832 C22.2@1829.46,1832
NetCN1_2: CN1.2 R8.1 | length 436.2
  Top Layer w6.3: CN1.2@2041.69,4685.51 2041.69,4588.58 2048.76,4581.51 2050.22,4581.51 2063.73,4568 v1@2064,4568
  Bottom Layer w6.3: R8.1@1841,4388.91 1843.17,4388.91 1847.81,4393.56 1847.81,4412.81 1983.5,4548.5 2044.5,4548.5 v1@2064,4568
  other v1: 2063.32,4570.06
NetCN1_3: CN1.3 R6.1 R7.1 | length 389.3
  Top Layer w6.3: v1@2006,4512 2006,4512.27 2010.1,4516.37 2010.1,4685.41 CN1.3@2010.2,4685.51
  Bottom Layer w6.3: R7.1@1897,4388.83 R6.1@1954,4388.83 1954,4481 1985,4512 v1@2006,4512
  other v1: 2009.02,4511.21
NetCN1_4: CN1.4 R5.1 | length 253.6
  Top Layer w6.3: v1@1931,4552 1955.87,4576.87 1958.87,4576.87 1983.54,4601.54 1983.54,4680.67 CN1.4@1978.7,4685.51
  Bottom Layer w6.3: R5.1@1866.91,4484 1866.91,4486.17 1907.56,4526.81 1907.56,4528.56 v1@1931,4552
  other v1: 1933.33,4553.21
NetCN2_1: CN2.1 SB5.1 SB6.2 | length 1130.4
  Top Layer w6.3: CN2.1@1522.29,3530 1522.14,3529.86 1532.69,3519.31 1642.31,3519.31 1696,3573 1696,3617 1584,3729 1584,3752 1627.87,3795.87 1627.87,3811.87 v1(1630,3814) ; v1(1621,3945) 1621,4023.13 1607.85,4036.27 1607.85,4108.64 1651.07,4151.86 1688.86,4151.86 v1(1715,4178) 1715,4181 1730.42,4196.43 1730.42,4201.76 1742.83,4214.17 SB6.2@1745,4214.17 ; SB5.1@1801,4214.09 1801.5,4214.09 1808,4207.59 v1(1808,4177)
  Bottom Layer w6.3: v1(1621,3945) 1621,3881.97 1630,3872.97 v1(1630,3814) ; v1(1715,4178) 1715.5,4177.5 1807.5,4177.5 v1(1808,4177)
NetCN2_2: CN2.2 SB7.1 SB8.2 | length 1953.6
  Top Layer w6.3: CN2.2@1522.29,3630 1522.29,3629.71 1599,3553 v1(1631,3553) ; v1(1722,3525) 1736,3539 1890,3539 1970,3459 2108.68,3459 2176,3391.68 SB8.2@2176,3205 ; v1(1839,4128) 1839,4133.75 1831,4141.75 1831,4226.17 1854.83,4250 SB7.1@1857,4250
  Bottom Layer w6.3: CN2.2@1522.29,3630 1522.29,3636.29 1568,3682 1645.48,3682 1698.48,3629 1728.68,3629 1758,3658.32 1758,3730 1912,3884 1912,4050.86 1839,4123.86 v1(1839,4128) ; v1(1631,3553) 1656.38,3553 1664.38,3561 1686,3561 v1(1722,3525)
NetCN2_3: CN2.3 SB9.1 SB10.2 | length 300.3
  Bottom Layer w6.3: CN2.3@1522.29,3730 1522.29,3729.71 1544,3708 1658.28,3708 1699.6,3749.32 ; SB9.1@1732.91,3716 1732.91,3718.17 1726.42,3724.66 1724.25,3724.66 1699.6,3749.32 ; SB10.2@1732.91,3773 1714.57,3773 1710.88,3769.31 1710.88,3760.6 1699.6,3749.32
NetCN2_4: CN2.4 SB11.1 SB12.2 | length 480.1
  Top Layer w6.3: v1@1420,3845 v1(1421,3844) SB12.2@1421,3799.91 ; CN2.4@1522.29,3830 1531.14,3838.85 1558.7,3838.85 1561.85,3842 1638,3842 1720.34,3924.34 1720.34,3987.59 1726.83,3994.09 SB11.1@1729,3994.09
  Bottom Layer w6.3: v1(1421,3844) 1426.75,3844 1459.75,3811 1494.72,3811 1513.72,3830 CN2.4@1522.29,3830
NetCN3_1: CN3.1 D3.1 R9.1 | length 217.6
  Top Layer w6.3: R9.1@1431,4023.91 1433.17,4023.91 1456.29,4047.03 1456.29,4063.5 1461.78,4069 1471,4069 D3.1@1479,4069 ; D3.1@1471,4070 1472,4069 D3.1@1479,4069 ; CN3.1@1514,4170 1514,4074.28 1508.72,4069 D3.1@1479,4069
NetCN3_2: CN3.2 R12.1 | length 100.2
  Top Layer w6.3: CN3.2@1514,4270 1549,4305 1590.72,4305 R12.1@1597.09,4311.36
NetCN3_4: CN3.4 R14.1 | length 852.4
  Top Layer w6.3: CN3.4@1514,4470 1588.31,4470 1616,4442.31 v1(1616,4367) ; v1(1634,4236) 1749.37,4236 1760.96,4224.41 1760.96,4195.96 1699.37,4134.37 1699.37,4099.63 1711,4088 1711,3992 v1(1675,3956)
  Bottom Layer w6.3: v1(1616,4367) 1616,4284.79 1634,4266.79 v1(1634,4236) ; v1(1675,3956) 1675,3955.59 1688.61,3941.98 1688.61,3904.19 1689.59,3903.21 1689.59,3891.5 R14.1@1696.09,3885
NetCN3_5: CN3.5 R15.1 | length 537.4
  Top Layer w6.3: CN3.5@1514,4570 1514,4560 1764.63,4309.37 1853.55,4309.37 R15.1@1913,4249.91
NetCN3_6: CN3.6 R17.1 | length 431.9
  Top Layer w6.3: CN3.6@1514,4670 1580,4670 1779,4471 1779,4455 1783,4451 v1(1783,4435)
  Bottom Layer w6.3: v1(1783,4435) 1783,4434.73 1785,4432.73 R17.1@1785,4389
NetD3_2: D3.2 R10.1 | length 1160.4
  Top Layer w6.3: D3.2@1571,4070 1571,3908.61 v1(1589.93,3878) ; v1(1611,3738) 1615.07,3742.07 1615.07,3758.42 1640.57,3783.93 2284.07,3783.93 v1(2321,3747)
  Bottom Layer w6.3: v1(1589.93,3878) v1(1589.93,3813) 1611,3791.93 v1(1611,3738) ; R10.1@2279.02,3721.6 2309.09,3721.6 2316.93,3729.45 2316.93,3742.93 v1(2321,3747)
NetLD1_1: LD1.1 R2.1 | length 108.7
  Top Layer w6.3: R2.1@1673,4652 1673,4649.83 1663.95,4640.79 1663.95,4631.05 1693,4602 1693,4594.86 1698.86,4589 1723.52,4589 LD1.1@1725.52,4587
NetLD2_2: LD2.2 R4.2 | length 175.4
  Top Layer w6.3: v2@1450,4773 v2(1451.46,4774.46) 1507.31,4774.46 LD2.2@1513.76,4780.91
  Bottom Layer w6.3: v2(1451.46,4774.46) 1459.91,4766 1548.35,4766 1553,4761.35 R4.2@1553,4760
NetLD2_3: LD2.3 R3.2 | length 165.7
  Top Layer w6.3: v2(1454,4832) 1507.76,4832 LD2.3@1513.76,4838
  Bottom Layer w6.3: v2(1454,4832) 1462.19,4823.81 1545.35,4823.81 1550,4819.17 R3.2@1550,4817